# Altium PCB SV601187A.PcbDoc (part 1 of 2)
Units mil, origin at the board's own origin, x right, y up, seen from the top; angles counter-clockwise.
Board outline 3260 x 1865 mil, 4 copper layers (Top Layer, MidLayer1, MidLayer2, Bottom Layer), stack 61.2 mil thick; 103 components, 64 nets, 340 pads, 114 vias.
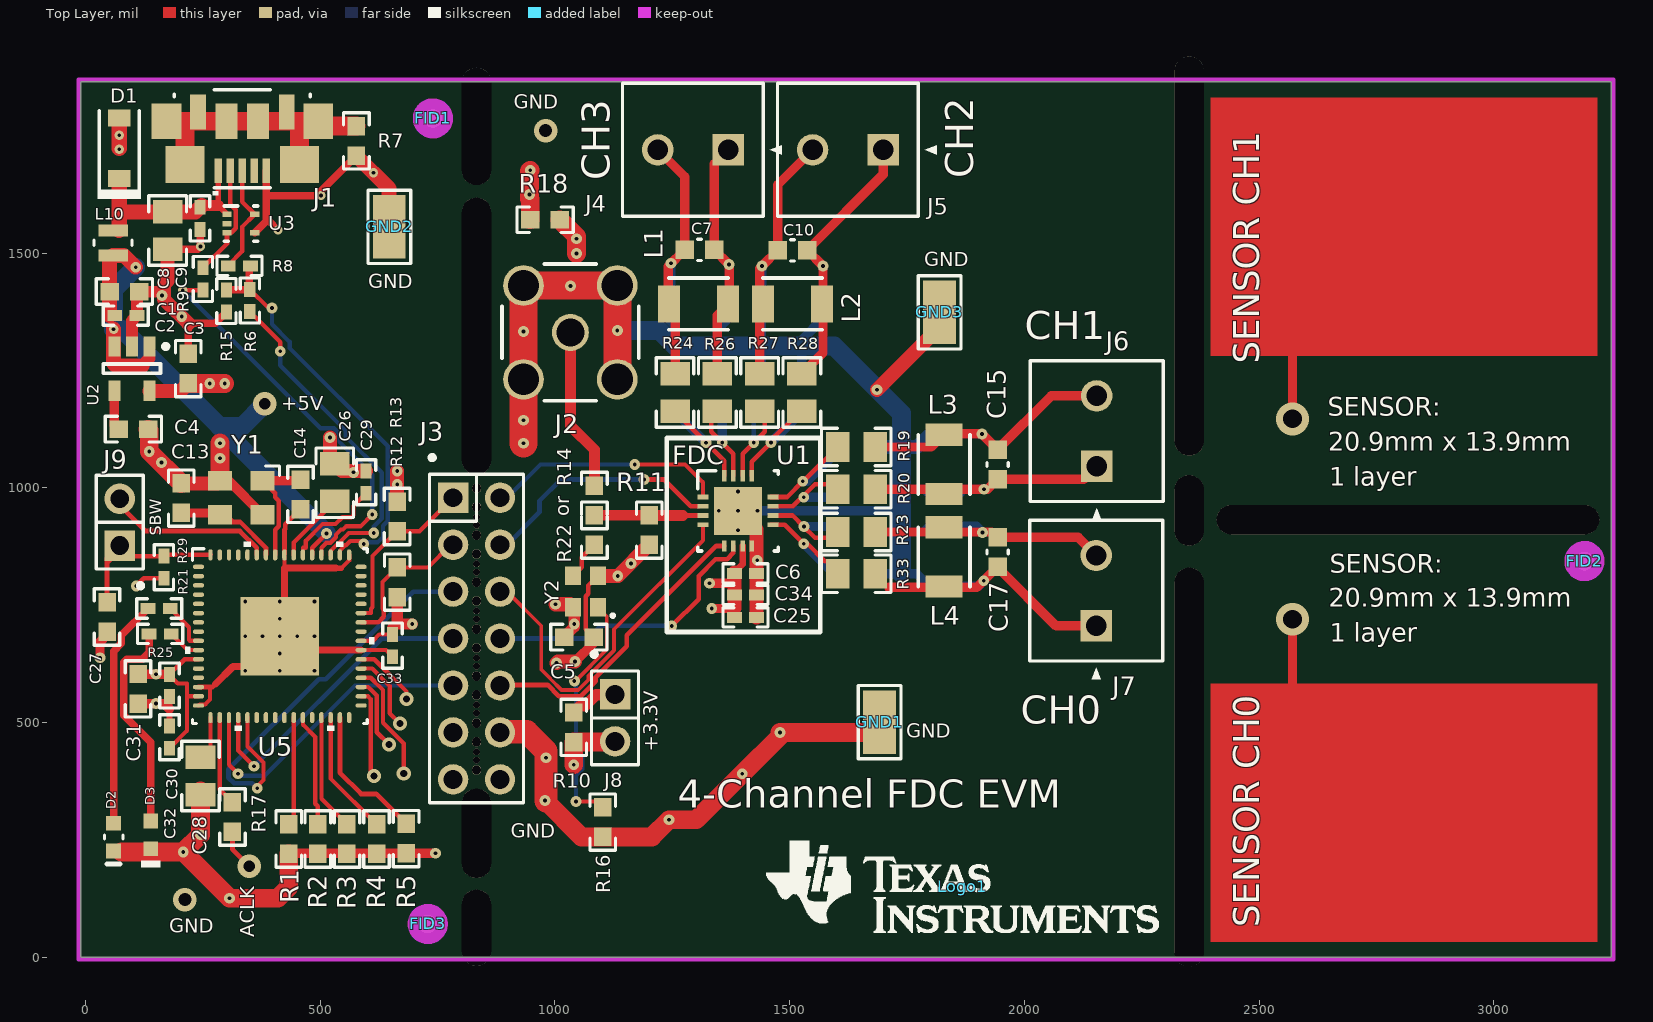
[diagram p0: Top Layer view]
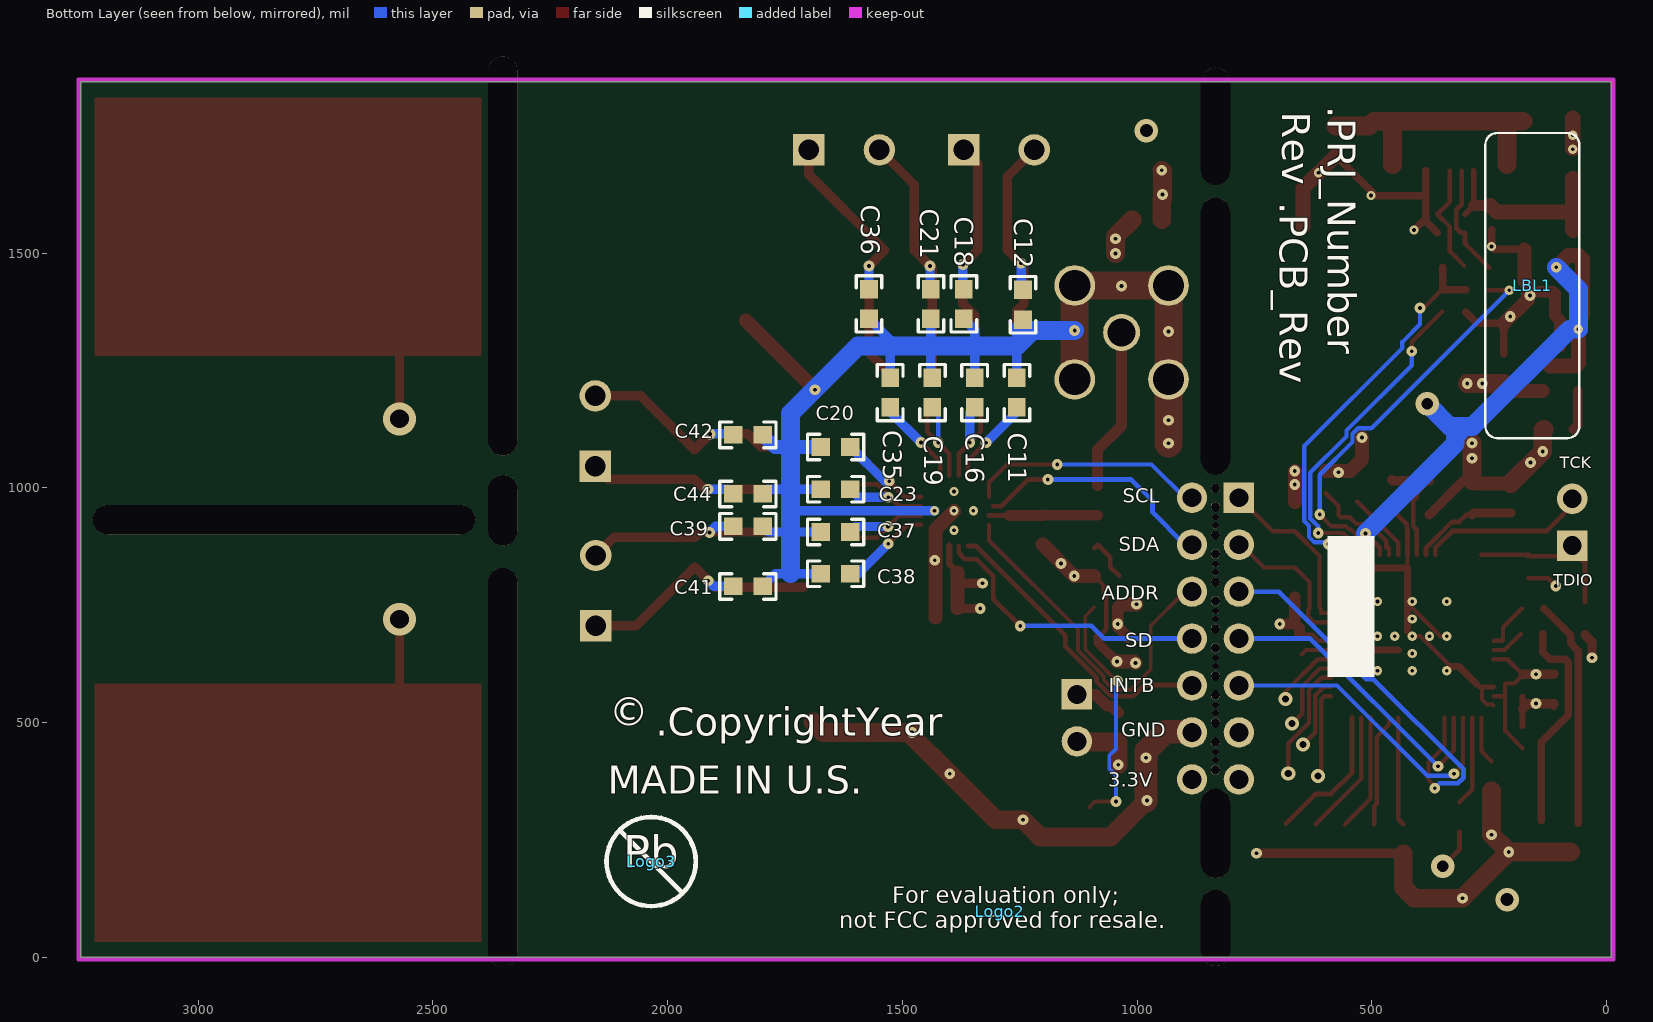
[diagram p1: Bottom Layer view, seen from below]
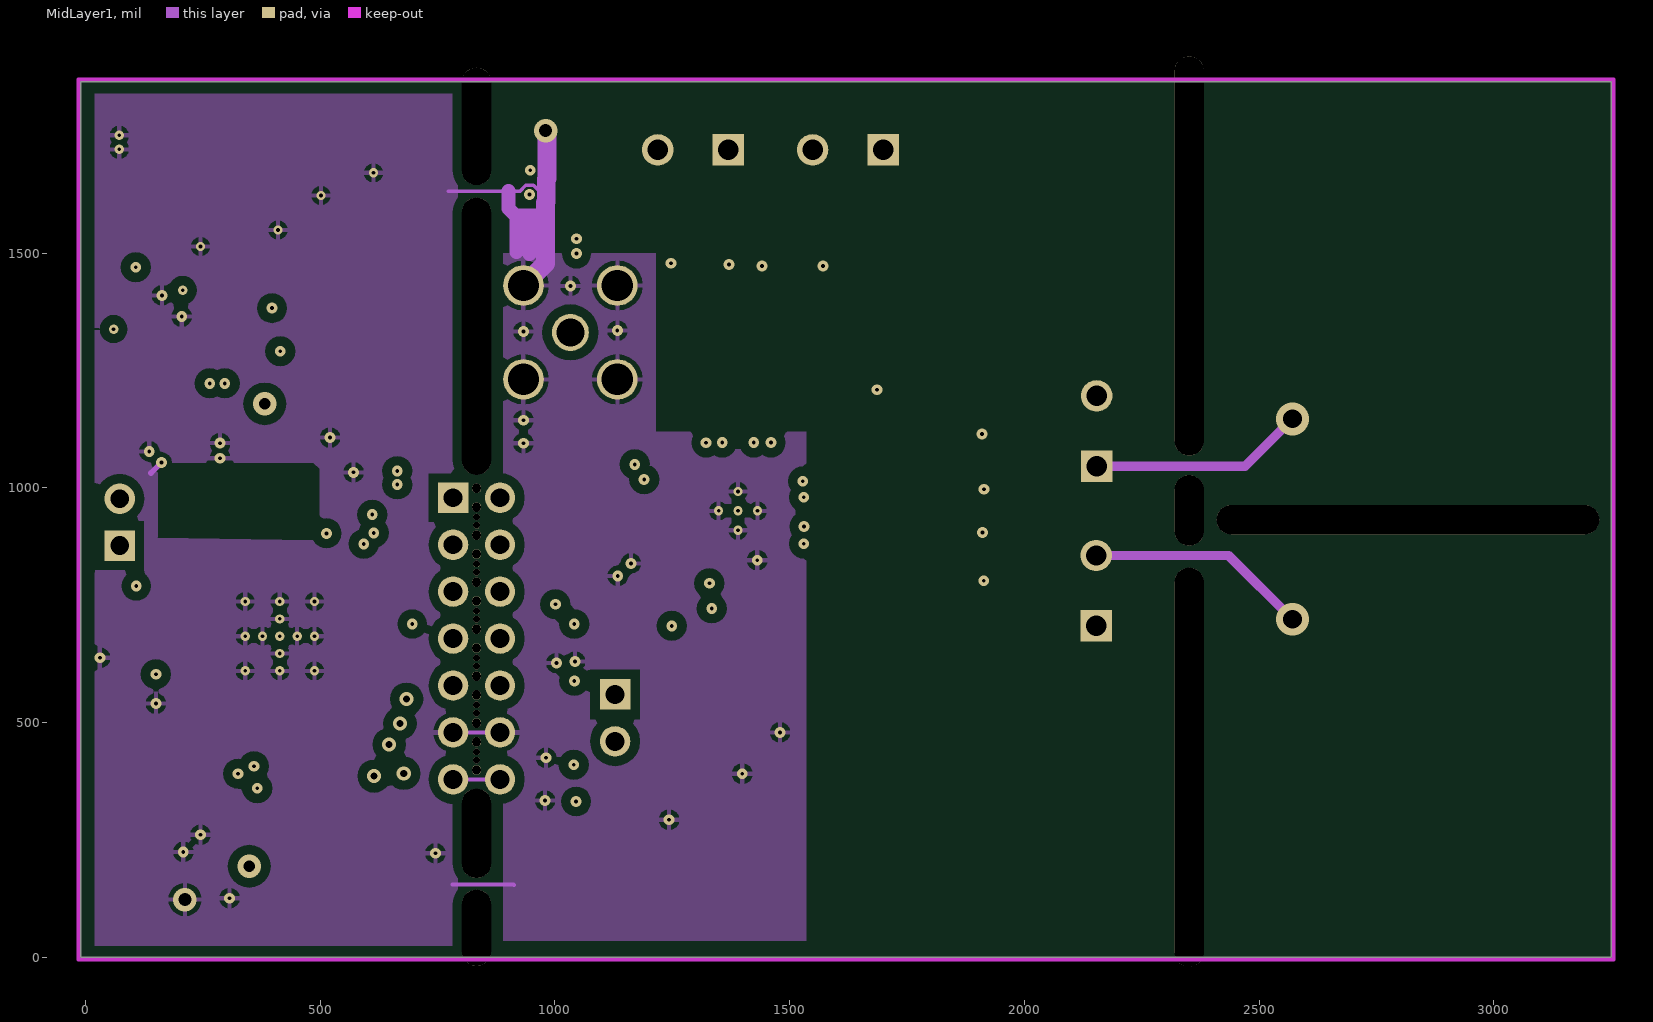
[diagram p2: MidLayer1]
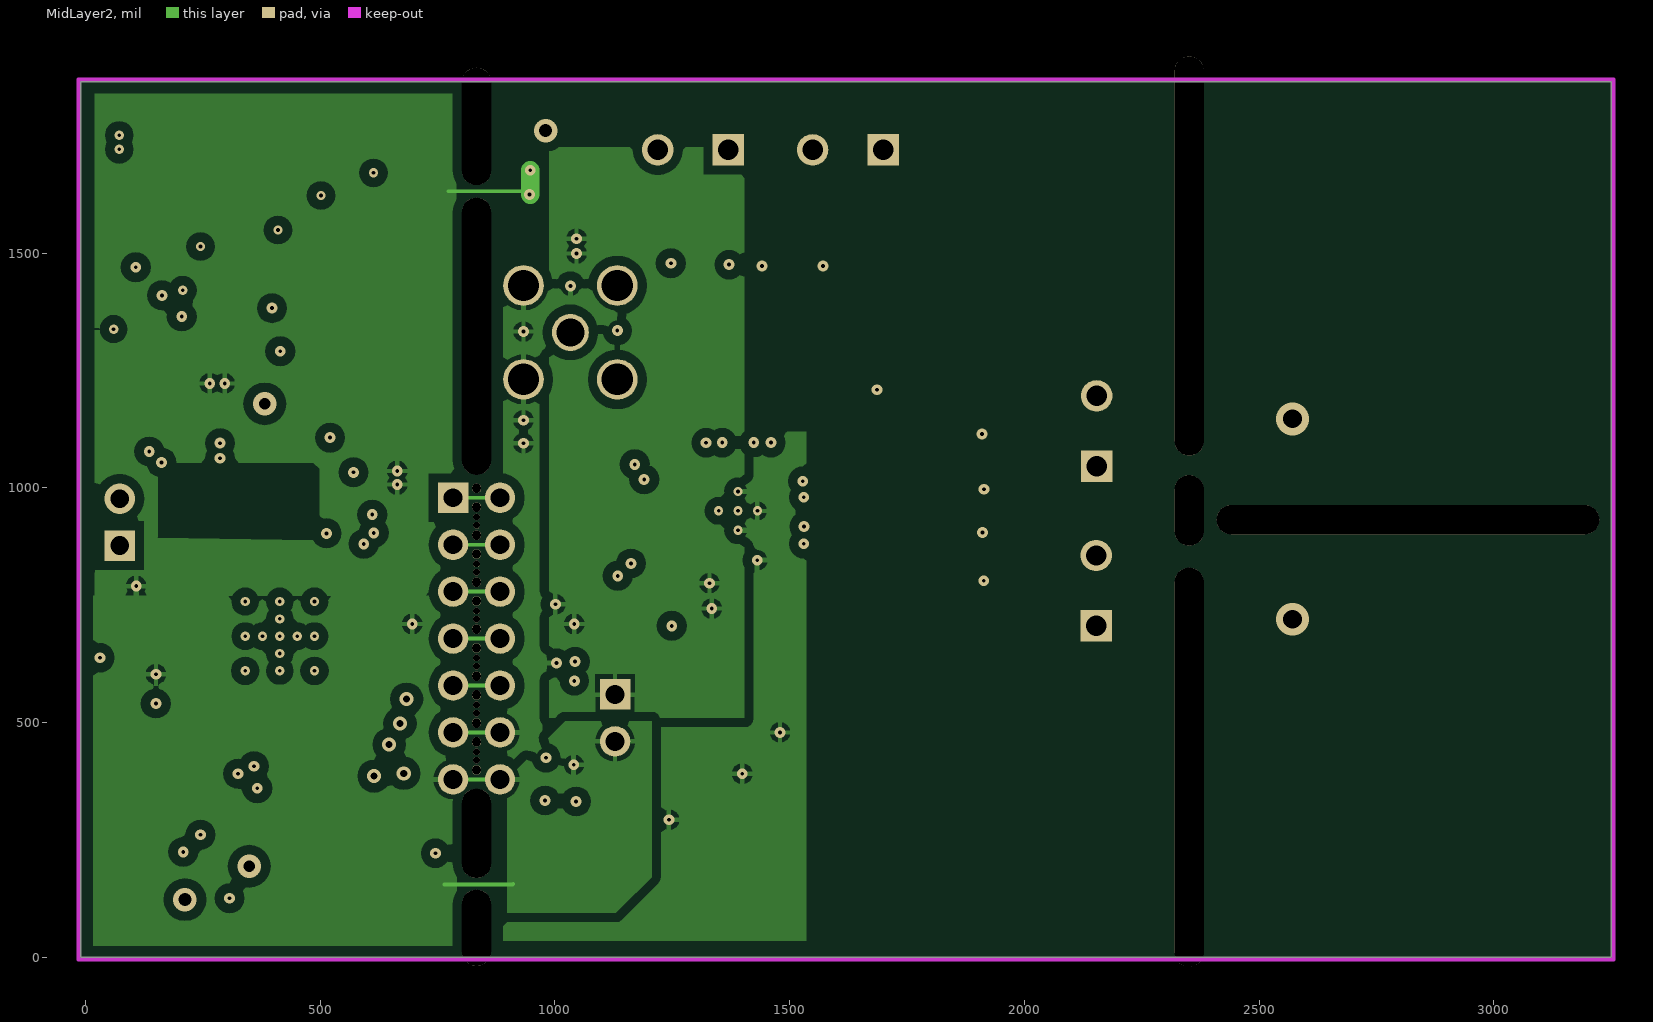
[diagram p3: MidLayer2]

## Layer stack, top to bottom
Top Solder: solder mask 0.4, Solder Resist, Dk 3.5
Top Layer: signal copper 1.4
Dielectric1: core 12.6, FR-4, Dk 3.9
MidLayer1: signal copper 1.4
Dielectric2: prepreg 30.4, FR-4, Dk 3.9
MidLayer2: signal copper 1.4
Dielectric3: core 12.6, FR-4, Dk 4.8
Bottom Layer: signal copper 1.4
Bottom Solder: solder mask 0.4, Solder Resist, Dk 3.5

## Board outline
-10,0 3250,0 3250,1865 -10,1865

## Design rules (kind name [scope] priority, off if disabled: settings)
AcuteAngle [All] p1: minimum=4.50000000000000E+0001 checktracksonly=FALSE
AssemblyTestPointUsage [All] p1: valid=2
Clearance Clearance_BoardEdge_MountingHoles [OnCopper and InComponentClass('Mounting Holes') vs IsKeepOut] p1: gap=40 ignorepadtopadclearanceinfootprint=FALSE except(0: Arc-Hole Track-Hole SMDPad-Hole THPad-Hole Via-Hole Fill-Hole Poly-Hole Region-Hole Text-Hole)
Clearance Clearance_BoardEdge_Poly [OnCopper and InPoly vs IsKeepOut] p2: gap=25 ignorepadtopadclearanceinfootprint=FALSE except(0: Arc-Hole Track-Hole SMDPad-Hole THPad-Hole Via-Hole Fill-Hole Poly-Hole Region-Hole Text-Hole)
Clearance Clearance_BoardEdge [OnCopper and Not InComponentClass('Logo') and not InComponentClass('FiducialMark') and not InRegion(1000,500,4000,800) and Not IsKeepout vs IsKeepOut] p3: gap=30 ignorepadtopadclearanceinfootprint=FALSE except(0: Arc-Hole Track-Hole SMDPad-Hole THPad-Hole Via-Hole Fill-Hole Poly-Hole Region-Hole Text-Hole)
Clearance Clearance_Poly [InPolygon] p4: gap=20 ignorepadtopadclearanceinfootprint=FALSE except(0: Arc-Hole Track-Hole SMDPad-Hole THPad-Hole Via-Hole Fill-Hole Poly-Hole Region-Hole Text-Hole)
Clearance [All] p5: gap=4 ignorepadtopadclearanceinfootprint=FALSE except(0: Arc-Hole Track-Hole SMDPad-Hole THPad-Hole Via-Hole Fill-Hole Poly-Hole Region-Hole Text-Hole)
ComponentClearance ComponentClearance_Logo [InComponentClass('Logo')] p1: gap=50 collisioncheckmode=3 verticalgap=10 showdistances=FALSE
ComponentClearance ComponentClearance_ScrewToNut [(HasFootprint('NY PMS 440 0025 PH')) vs (HasFootprint('Keystone_1902C'))] p2: gap=5 collisioncheckmode=3 verticalgap=10 showdistances=FALSE
ComponentClearance ComponentClearance_MountingHoles [InComponentClass('Mounting Holes')] p3: gap=250 collisioncheckmode=3 verticalgap=100000 showdistances=FALSE
ComponentClearance ComponentClearance_SmallPassives [HasFootprint('0201*') or HasFootprint('0402*') or HasFootprint('0508') or HasFootprint('0603*') or HasFootprint('0612') or HasFootprint('0805*') or HasFootprint('0815*') or HasFootprint('0830*') or HasFootprint('1206*') or HasFootprint('1210*') or HasFootprint('1808*') or HasFootprint('1812*') or HasFootprint('1825*') or HasFootprint('2010*') or HasFootprint('2220*') or HasFootprint('2225*') or HasFootprint('2512*') or HasFootprint('2728*') or HasFootprint('3518*') vs HasFootprint('0201*') or HasFootprint('0402*') or HasFootprint('0508') or HasFootprint('0603*') or HasFootprint('0612') or HasFootprint('0805*') or HasFootprint('0815*') or HasFootprint('0830*') or HasFootprint('1206*') or HasFootprint('1210*') or HasFootprint('1808*') or HasFootprint('1812*') or HasFootprint('1825*') or HasFootprint('2010*') or HasFootprint('2220*') or HasFootprint('2225*') or HasFootprint('2512*') or HasFootprint('2728*') or HasFootprint('3518*')] p4: gap=20 collisioncheckmode=3 verticalgap=10 showdistances=FALSE
ComponentClearance ComponentClearance_THtoSMT [IsThruComponent vs IsSMTComponent] p5: gap=75 collisioncheckmode=3 verticalgap=30 showdistances=FALSE
ComponentClearance ComponentClearance_THtoTH [IsThruComponent vs IsThruComponent] p6: gap=78.74 collisioncheckmode=3 verticalgap=30 showdistances=TRUE
ComponentClearance [All] p7: gap=40 collisioncheckmode=3 verticalgap=10 showdistances=FALSE
DiffPairsRouting [All] p1: maxlimit=100 minlimit=10 mostfreqgap=10 toplayer_minwidth=15 toplayer_maxwidth=15 toplayer_prefwidth=15 midlayer1_minwidth=15 midlayer1_maxwidth=15 midlayer1_prefwidth=15 midlayer2_minwidth=15 midlayer2_maxwidth=15 midlayer2_prefwidth=15 bottomlayer_minwidth=15 bottomlayer_maxwidth=15 bottomlayer_prefwidth=15 maxuncoupledlength=1000
FabricationTestPointUsage TestPointUsage [All] p1: valid=2 allowmultiple=FALSE
FabricationTestpoint Testpoint [All] p1: side=3 testpointundercomponent=TRUE minsize=40 maxsize=100 preferedsize=60 minholesize=0 maxholesize=40 preferedholesize=32 testpointgrid=1 allowsidetop=TRUE allowsidebottom=TRUE usegrid=TRUE gridtolerance=0.01
FanoutControl Fanout_LCC [IsLCC] p1: bgadir=Out bgaviamode=Centered fanoutstyle=Auto fanoutdirection=Alternating viagrid=1 // Fanout_LCC (Default Rule)
FanoutControl Fanout_BGA [IsBGA] p2: bgadir=Out bgaviamode=Centered fanoutstyle=Auto fanoutdirection=Alternating viagrid=1 // Fanout_BGA (Default Rule)
FanoutControl Fanout_Default [All] p4: bgadir=Out bgaviamode=Centered fanoutstyle=Auto fanoutdirection=Alternating viagrid=1 // Fanout_Default (Default Rule)
FanoutControl Fanout_Small [(CompPinCount < 5)] p5: bgadir=Out bgaviamode=Centered fanoutstyle=Auto fanoutdirection=OutThenIn viagrid=1 // Fanout_Small (Default Rule)
HoleSize [All] p1: absolutevalues=TRUE maxlimit=251 minlimit=7.87 maxpercent=80.000 minpercent=20.000
HoleToHoleClearance [All] p1: gap=21 allowstackedmicrovias=TRUE
MinimumAnnularRing MinimumAnnularRing_ThermalPadVias [IsVia and InAnyComponent] p1: minimumring=5.91
MinimumAnnularRing [All] p2: minimumring=6
MinimumSolderMaskSliver MinimumSolderMaskSliver_Logo [InComponentClass('Logo') vs InComponentClass('Logo')] p1: minsoldermaskwidth=0.7
MinimumSolderMaskSliver [All] p2: minsoldermaskwidth=3.94
PlaneConnect [All] p1: planeconnectstyle=Relief reliefexpansion=10 reliefentries=4 reliefconductorwidth=10 reliefairgap=10
PolygonConnect [All] p1: connectstyle=Relief reliefconductorwidth=10 reliefentries=4 polygonreliefangle="90 Angle" airgapwidth=10
RoutingVias ThermalPadVias [IsVia and InAnyComponent] p1: holewidth=7.87 width=19.68 viastyle="Through Hole" minholewidth=7.87 minwidth=19.68 maxholewidth=12.99 maxwidth=23.62
RoutingVias [All] p2: holewidth=16 width=34 viastyle="Through Hole" minholewidth=7.87 minwidth=20 maxholewidth=40 maxwidth=65
SMDToCorner [All] p1: distance=30000
SilkToSilkClearance [All] p1: silktosilkclearance=5
SilkToSolderMaskClearance SilkscreenOverComponentPads [IsPad] p1: minsilkscreentomaskgap=5 clearancetoexposedcopper=TRUE
SolderMaskExpansion [All] p1: expansion=1.97 istentingtop=FALSE
Width [All] p1: maxlimit=100 minlimit=4 preferedwidth=10 checkconnectedcopper=TRUE
15 further rules are at their usual default settings.

## Classes and differential pairs
component class Label: LBL1
component class FiducialMark: FID1 FID2 FID3
component class Logo: Logo1
component class Header: J3 J8 J9

## Components (designator, comment, footprint, x,y, rotation, side; value= is the part's Value field where it differs from the comment)
C1 "C1608X5R1A106M" 0603 83,1418 r0 top
C2 "GRM155R71C104JA88D" 0402 85.99,1366.82 r0 top
C3 "C0603C225K8PACTU" 0603 219,1254 r90 top
C4 "C1608C0G1E103J" 0603 102,1125 r0 top
C5 "C1608C0G1E103J" 0603 1051,682 r0 top
C6 "C1005X7R1C103K" 0402 1406,818 r0 top
C7 "CL10C330FB8NNNC" 0603_950 1308,1507 r0 top
C8 "C2012X5R1C226K125AC" 0805_HV 175,1548 r270 top
C9 "GRM155R71C104JA88D" 0402 244,1574 r270 top
C10 "CL10C330FB8NNNC" 0603_950 1506,1506 r0 top
C11 "GRM1885C2A180JA01D" 0603 1256,1203 r270 bottom
C12 "GRM1885C2A180JA01D" 0603 1243,1390.04 r90 bottom
C13 "GRM1885C2A180JA01D" 0603 204,978 r270 top
C14 "GRM1885C2A180JA01D" 0603 458,986 r90 top
C15 "CL10C330FB8NNNC" 0603_950 1943,1050 r270 top
C16 "GRM1885C2A180JA01D" 0603 1346,1203 r90 bottom
C17 "CL10C330FB8NNNC" 0603_950 1943,863 r270 top
C18 "GRM1885C2A180JA01D" 0603 1368.99,1392 r270 bottom
C19 "GRM1885C2A180JA01D" 0603 1436,1203 r270 bottom
C20 "GRM1885C2A180JA01D" 0603 1642,1087 r180 bottom
C21 "GRM1885C2A180JA01D" 0603 1439.07,1392 r90 bottom
C23 "GRM1885C2A180JA01D" 0603 1642,997 r0 bottom
C25 "GRM155R61A105KE15D" 0402 1406,724 r0 top
C26 "08053C224JAT2A" 0805_HV 531,1011 r90 top
C27 "C0603X222K5RACTU" 0603 46,725 r90 top
C28 "08053C224JAT2A" 0805_HV 245,386 r270 top
C29 "C1005C0G1H221F050BA" 0402 598,1012 r90 top
C30 "GRM155R71C104JA88D" 0402 179,579 r270 top
C31 "C1608X5R1A106M" 0603 112,572 r270 top
C32 "GRM155R71C104JA88D" 0402 179,469 r90 top
C33 "GRM155R71C104JA88D" 0402 654,664 r270 top
C34 "GRM155R71C104JA88D" 0402 1406,772 r0 top
C35 "GRM1885C2A180JA01D" 0603 1526,1203 r90 bottom
C36 "GRM1885C2A180JA01D" 0603 1570.96,1392 r270 bottom
C37 "GRM1885C2A180JA01D" 0603 1642,906 r180 bottom
C38 "GRM1885C2A180JA01D" 0603 1642,817 r0 bottom
C39 "GRM1885C2A180JA01D" 0603 1829,917.96 r0 bottom
C41 "GRM1885C2A180JA01D" 0603 1829,790.01 r180 bottom
C42 "GRM1885C2A180JA01D" 0603 1829,1112.99 r0 bottom
C44 "GRM1885C2A180JA01D" 0603 1829,987.01 r180 bottom
D1 "MMSZ5232B-7-F" SOD-123 72,1723 r90 top
D2 "LG L29K-G2J1-24-Z" "LG L29K_GREEN" 60,256 r270 top
D3 "SML-LX0603SRW-TR" SML-LX0603SRW_SuperRed 139,261 r270 top
FID1 "Fiducial" Fiducial10-20 740,1787 r0 top
FID2 "Fiducial" Fiducial10-20 3193,844 r0 top
FID3 "Fiducial" Fiducial10-20 729,71 r0 top
GND1 "5015" Testpoint_Keystone_Miniature 1691,501 r90 top
GND2 "5015" Testpoint_Keystone_Miniature 647,1556 r90 top
GND3 "5015" Testpoint_Keystone_Miniature 1819,1374 r90 top
J1 "ZX62R-B-5P" Hirose_ZX62R-B-5P 334,1781 r90 top
J2 "901-144-8RFX" Amphenol_901-144-8RFX 1033,1331 r90 top
J3 "TSW-107-07-G-D" TSW-107-07-G-D 833,679 r270 top
J4 "1727010" PhoenixConact_1727010 1294,1720 r180 top
J5 "1727010" PhoenixConact_1727010 1624,1720 r180 top
J6 "1727010" PhoenixConact_1727010 2154,1121 r90 top
J7 "1727010" PhoenixConact_1727010 2153,781 r90 top
J8 "TSW-102-07-G-S" TSW-102-07-G-S 1128,510 r270 top
J9 "TSW-102-07-G-S" TSW-102-07-G-S 73,927 r90 top
L1 "CMH322522-180KL" CMH322522 1306,1392 r180 top
L2 "CMH322522-180KL" CMH322522 1506,1392 r180 top
L3 "CMH322522-180KL" CMH322522 1829,1050 r90 top
L4 "CMH322522-180KL" CMH322522 1829,853 r90 top
L10 "VLS201610ET-100M" VLS201610ET 59,1522 r270 top
LBL1 "Size: 0.65\" x 0.20 \"" Label_650x200 158,1430.93 r90 bottom
Logo1 "Texas Instruments" TI_Stacked_Overlay_Small 1868,150 r0 top
Logo2 "FCC disclaimer" FCC_disclaimer_stacked 1292,97 r180 bottom
Logo3 "Pb-Free Symbol" Pb-Free_Overlay_Medium 2035,204 r180 bottom
R1 "CRCW06030000Z0EA" 0603 433,252 r270 top
R2 "CRCW06030000Z0EA" 0603 495,252 r270 top
R3 "CRCW06030000Z0EA" 0603 557,252 r270 top
R4 "CRCW06030000Z0EA" 0603 620,252 r270 top
R5 "CRCW06030000Z0EA" 0603 683,253 r270 top
R6 "CRCW04021K50JNED" 0402 350,1399 r270 top
R7 "CRCW060333R0JNEA" 0603 577,1739 r90 top
R8 "CRCW040210R0FKED" 0402 328,1473 r0 top
R9 "CRCW040210R0FKED" 0402 250,1445 r270 top
R10 "CRCW06030000Z0EA" 0603 1040,490 r90 top
R11 "CRCW060349R9FKEA" 0603 1201,910 r90 top
R12 "RC0603FR-074K7L" 0603 664,799 r270 top
R13 "RC0603FR-074K7L" 0603 664,939 r90 top
R14 "CRCW06030000Z0EA" 0603 1084,973 r270 top
R15 "RC0402JR-071ML" 0402 300,1398 r90 top
R16 "CRCW06030000Z0EA" 0603 1102,288 r90 top
R17 "CRCW060333R0JNEA" 0603 313,299 r270 top
R18 "CRCW06030000Z0EA" 0603 979,1571 r0 top
R19 "CRCW08050000Z0EA" 0805_HV 1642,1087 r0 top
R20 "CRCW08050000Z0EA" 0805_HV 1642,997 r0 top
R21 "CRCW04021K00JNED" 0402 157,743 r180 top
R22 "CRCW06030000Z0EA" 0603 1084,910 r90 top
R23 "CRCW08050000Z0EA" 0805_HV 1642,906 r0 top
R24 "CRCW08050000Z0EA" 0805_HV 1256,1203 r90 top
R25 "CRCW04021K00JNED" 0402 159,689 r180 top
R26 "CRCW08050000Z0EA" 0805_HV 1346,1203 r90 top
R27 "CRCW08050000Z0EA" 0805_HV 1436,1203 r90 top
R28 "CRCW08050000Z0EA" 0805_HV 1526,1203 r90 top
R29 "CRCW040233K0JNED" 0402 167,831 r90 top
R33 "CRCW08050000Z0EA" 0805_HV 1642,817 r0 top
U1 "FDC2114RGHR" RGH0016A 1390,951 r0 top
U2 "LP2985AIM5-3.3/NOPB" MF05A_N 99,1254 r270 top
U3 "TPD2E001DRLR" DRL0005A 331,1563 r0 top
U5 "MSP430F5528IRGC" RGC0064B 414,684 r0 top
Y1 "ABM8-24.000MHZ-B2-T" XTAL_ABM8 332,979 r270 top
Y2 "625L3C040M00000" OSC_CTS_625 1065,779 r180 top

## Footprints (in the part's own frame and the unit in brackets; to place one, negate y for a bottom-side part, rotate by r counter-clockwise, add the part's x,y. Pads: shape width x height; smd on the part's side, far side on the other; paste and mask are expansions set on the pad)
0402 [mm] "0402 from SM-752 data"
  rect 0.8x0.6 smd: 1(-0.6,0) 2(0.6,0)
  silkscreen extent -1.22,-0.52 1.22,0.52, body extent -0.55,-0.3 0.55,0.3, height 0.6
0603 [mm] "0603 from SM-752 data"
  rect 1x0.95 smd: 1(-0.8,0) 2(0.8,0)
  silkscreen extent -1.52,-0.69 1.52,0.69, body extent -0.87,-0.47 0.87,0.47, height 0.85
0603_950 [mm] "0603_950"
  rect 1x1 smd: 1(-0.8,0) 2(0.8,0)
  silkscreen extent -0.1,-0.58 0.1,0.58, body extent -0.87,-0.48 0.87,0.48, height 0.95
0805_HV [mil] "0805 with 30mil clearance between pads"
  rect 50x63 smd: 1(-40,0) 2(40,0)
  silkscreen extent -74,-40 74,40, body extent -43,-29 43,29, height 43
Amphenol_901-144-8RFX [mm] "SMA Straight Jack, TH"
  round 2 hole 1.5: 1(0,0)
  round 2.2 hole 1.7: 2(-2.54,2.54) 3(-2.54,-2.54) 4(2.54,-2.54) 5(2.54,2.54)
  silkscreen extent -3.7,-3.7 3.7,3.7, body extent -3.7,-3.7 3.7,3.7, height 9.93
CMH322522 [mm] "Bourns"
  rect 1.2x2 smd: 1(-1.6,0) 2(1.6,0)
  silkscreen extent -1.6,-1.4 1.6,1.4, body extent -1.7,-1.35 1.7,1.35, height 2.4
DRL0005A [mm] "SOTFL, 5-Flat Leads, Body 1.2x1.6x0.6mm, Pitch 0.5mm, TI recommended"
  rect 0.5x0.3 smd: 1(-0.75,0.5) 2(-0.75,0) 3(-0.75,-0.5) 4(0.75,-0.5) 5(0.75,0.5)
  silkscreen extent -0.9,-0.95 0.9,0.95, body extent -0.85,-0.85 0.85,0.85, height 0.62
FCC_disclaimer_stacked [mil]
Fiducial10-20 [mm]
  round 1 smd mask+0.5: 1(0,0)
  Top Layer keep-out circle w1.178: c0,0 r0.5
Hirose_ZX62R-B-5P [mm] "Hirose"
  rect 1.35x0.4 smd: 1(-2.68,1.3) 2(-2.68,0.65) 3(-2.68,0) 4(-2.68,-0.65) 5(-2.68,-1.3)
  rect 2x2.1 smd: 6(-2.35,-3.1) 7(-2.35,3.1)
  rect 1.9x1.6 smd: 8(0,-4.1) 13(0,4.1)
  rect 1.88x0.85 smd: 9(0.495,-2.4) 12(0.495,2.4)
  rect 1.9x1.2 smd: 10(0,-0.85) 11(0,0.85)
  silkscreen extent -4,-3.67 1.7,3.67, body extent -2.57,-3.48 2.11,3.45, height 2.65
Label_650x200 [mil] "Thermal Transfer Label"
  round 1 on Mech14: 0(0,0)
  silkscreen extent -325,-100 325,100, body extent -325,-100 325,100, height 1
"LG L29K_GREEN" [mm] "OSRAM"
  rect 0.8x0.8 smd paste-0.4: 1(-0.75,0) 2(0.75,0)
  silkscreen extent -0.1,-0.5 1.45,0.5, body extent -0.9,-0.45 0.9,0.45, height 0.67
MF05A_N [mm] "SOT23, 5-Leads, Body 2.9x1.6mm, Pitch 0.95mm, Lead Span 2.8mm, IPC Medium Density"
  rect 1.1x0.65 smd: 1(-1.2,0.95) 2(-1.2,0) 3(-1.2,-0.95) 4(1.2,-0.95) 5(1.2,0.95)
  silkscreen extent -1.32,-1.55 0.25,1.95, body extent -0.9,-1.55 0.9,1.55, height 1.19
OSC_CTS_625 [mm] "CTS"
  rect 0.85x1 smd: 1(-0.675,0.85) 2(-0.675,-0.85) 3(0.675,-0.85) 4(0.675,0.85)
  silkscreen extent -1.53,1.25 -1.43,1.35, body extent -1.1,-1.35 1.1,1.35, height 1.02
Pb-Free_Overlay_Medium [mil]
  silkscreen extent -95,-95 95,95
PhoenixConact_1727010 [mm]
  rect 1.7x1.7 hole 1.1: 1(-1.905,0)
  round 1.7 hole 1.1: 2(1.905,0)
  silkscreen extent -4.8,-3.6 3.81,3.6, body extent -3.81,-3.6 3.81,3.7, height 8.52
RGC0064B [mm]
  oval 0.6x0.24 smd mask+0.07: 1(-4.4,3.75) 2(-4.4,3.25) 3(-4.4,2.75) 4(-4.4,2.25) 5(-4.4,1.75) 6(-4.4,1.25) 7(-4.4,0.75) 8(-4.4,0.25) 9(-4.4,-0.25) 10(-4.4,-0.75) 11(-4.4,-1.25) 12(-4.4,-1.75) 13(-4.4,-2.25) 14(-4.4,-2.75) 15(-4.4,-3.25) 16(-4.4,-3.75) 33(4.4,-3.75) 34(4.4,-3.25) 35(4.4,-2.75) 36(4.4,-2.25) 37(4.4,-1.75) 38(4.4,-1.25) 39(4.4,-0.75) 40(4.4,-0.25) 41(4.4,0.25) 42(4.4,0.75) 43(4.4,1.25) 44(4.4,1.75) 45(4.4,2.25) 46(4.4,2.75) 47(4.4,3.25) 48(4.4,3.75)
  oval 0.24x0.6 smd mask+0.07: 17(-3.751,-4.4) 18(-3.251,-4.4) 19(-2.751,-4.4) 20(-2.251,-4.4) 21(-1.75,-4.4) 22(-1.25,-4.4) 23(-0.75,-4.4) 24(-0.25,-4.4) 25(0.25,-4.4) 26(0.75,-4.4) 27(1.25,-4.4) 28(1.75,-4.4) 29(2.251,-4.4) 30(2.751,-4.4) 31(3.251,-4.4) 32(3.751,-4.4) 49(3.751,4.4) 50(3.251,4.4) 51(2.751,4.4) 52(2.251,4.4) 53(1.75,4.4) 54(1.25,4.4) 55(0.75,4.4) 56(0.25,4.4) 57(-0.25,4.4) 58(-0.75,4.4) 59(-1.25,4.4) 60(-1.75,4.4) 61(-2.251,4.4) 62(-2.751,4.4) 63(-3.251,4.4) 64(-3.751,4.4)
  rect 4.25x4.25 smd paste-2.112: 65(0,0)
  silkscreen extent -5.1,-5.1 5.1,5.1, body extent -4.57,-4.57 4.57,4.57, height 1.01
RGH0016A [mm] "QFN, 16-Leads, Body 4x4mm, Pitch 0.5mm, TI Recommended"
  rect 0.6x0.25 smd: 1(-1.9,0.75) 2(-1.9,0.25) 3(-1.9,-0.25) 4(-1.9,-0.75) 9(1.9,-0.75) 10(1.9,-0.25) 11(1.9,0.25) 12(1.9,0.75)
  rect 0.25x0.6 smd: 5(-0.75,-1.9) 6(-0.25,-1.9) 7(0.25,-1.9) 8(0.75,-1.9) 13(0.75,1.9) 14(0.25,1.9) 15(-0.25,1.9) 16(-0.75,1.9)
  rect 2.6x2.6 smd paste-1.3: 17(0,0)
  silkscreen extent -2.17,-2.17 2.17,2.17, body extent -2.05,-2.05 2.05,2.05, height 0.81
SML-LX0603SRW_SuperRed [mm] "Lumex Opto/Components Inc"
  rect 0.8x0.8 smd: 1(-0.75,0) 2(0.75,0)
  silkscreen extent 1.4,-0.52 1.78,0.53, body extent -0.92,-0.53 0.92,0.53, height 1.1
SOD-123 [mm] "On Semi recommended land pattern"
  rect 0.915x1.22 smd: 1(-1.637,0) 2(1.637,0)
  silkscreen extent -2.74,-1.17 2.03,1.17, body extent -1.93,-0.9 1.93,0.9, height 1.35
Testpoint_Keystone_Miniature [mil] "Miniature SMT test point"
  rect 135x70 smd: 1(0,0)
  silkscreen extent -78,-46 78,45, body extent -52,-20 52,20, height 61
TI_Stacked_Overlay_Small [mil]
  silkscreen extent -418,-98 418,98
TSW-102-07-G-S [mm] "Samtec 100mil, 1x2, 230 mil above insulator"
  rect 1.65x1.65 hole 1.016 mask+0: 1(-1.27,0)
  round 1.65 hole 1.016 mask+0: 2(1.27,0)
  silkscreen extent -3.56,-1.27 2.54,1.27, body extent -2.54,-1.27 2.54,1.27, height 8.38
TSW-107-07-G-D [mm] "Samtec 100mil, 2x7, 230 mil above insulator"
  rect 1.65x1.65 hole 1.016 mask+0: 1(-7.62,-1.27)
  round 1.65 hole 1.016 mask+0: 2(-7.62,1.27) 3(-5.08,-1.27) 4(-5.08,1.27) 5(-2.54,-1.27) 6(-2.54,1.27) 7(0,-1.27) 8(0,1.27) 9(2.54,-1.27) 10(2.54,1.27) 11(5.08,-1.27) 12(5.08,1.27) 13(7.62,-1.27) 14(7.62,1.27)
  silkscreen extent -9.91,-2.54 8.89,2.54, body extent -8.89,-2.54 8.89,2.54, height 8.38
VLS201610ET [mm] "TDK"
  rect 0.65x1.6 smd: 1(-0.675,0) 2(0.675,0)
  silkscreen extent -0.15,-1.02 0.15,1.02, body extent -1.05,-0.85 1.05,0.85, height 0.95
XTAL_ABM8 [mm] "Abracon recommended land pattern"
  rect 1.05x1.3 smd: 1(-0.925,1.15) 2(-0.925,-1.15) 3(0.925,-1.15) 4(0.925,1.15)
  silkscreen extent -1.73,1.3 -1.2,2.07, body extent -1.35,-1.7 1.35,1.7, height 0.8

## Part data
C1 C31: "CAP, CERM, 10uF, 10V, +/-20%, X5R, 0603"
C2 C9 C30 C32 C33 C34: library part 0402YC132KAT2A, "CAP CER 0.1UF 16V 5% X7R 0402"
C3: "CAP, CERM, 2.2uF, 10V, +/-10%, X5R, 0603"
C4 C5: "CAP, CERM, 0.01uF, 25V, +/-5%, C0G/NP0, 0603"
C6: "CAP, CERM, 0.01 礔, 16 V, +/- 10%, X7R, 0402"
C7 C10 C15 C17: "CAP, CERM, 33 pF, 50 V, +/- 1%, C0G/NP0, 0603_950"
C8: "CAP, CERM, 22uF, 16V, +/-10%, X5R, 0805"
C11 C12 C13 C14 C16 C18 C19 C20 C21 C23 C35 C36 C37 C38 C39 C41 C42 C44: "CAP, CERM, 18pF, 100V, +/-5%, C0G/NP0, 0603"
C25: "CAP, CERM, 1uF, 10V, +/-10%, X5R, 0402"
C26 C28: "CAP, CERM, 0.22 礔, 25 V, +/- 5%, X7R, 0805"
C27: "CAP, CERM, 2200pF, 50V, +/-10%, X7R, 0603"
C29: library part 0402YC132KAT2A, "CAP CER 220PF 50V 1% NP0 0402"
D1: "Diode, Zener, 5.6V, 500mW, SOD-123"
D2: "LED, Green, SMD"
D3: "LED, Super Red, SMD"
FID1 FID2 FID3: "Fiducial mark.  There is nothing to buy or mount."
GND1 GND2 GND3: "Test Point, Miniature, SMT"
J1: "Connector, Receptacle, Micro-USB Type B, SMT"
J2: "SMA Straight Jack, Gold, 50 Ohm, TH"
J3: "Header, 100mil, 7x2, Gold, TH"
J4 J5 J6 J7: "Conn Term Block, 2POS, 3.81mm, TH"
J8 J9: "Header, TH, 100mil, 2x1, Gold plated, 230 mil above insulator"
L1 L2 L3 L4: "Inductor, Shielded, Ferrite, 18 礖, 0.12 A, 3.3 ohm, SMD"
L10: "Inductor, Shielded, Ferrite, 10 礖, 0.4 A, 1.38 ohm, SMD"
LBL1: library part THT-14-423-10, "Thermal Transfer Printable Labels, 0.650\" W x 0.200\" H - 10,000 per roll"
Logo1: library part TI_Logo, "Texas Instrument Corporate Signature"
Logo2: library part FCC_disclaimer, "FCC_disclaimer"
Logo3: library part Pb-Free
R1 R2 R3 R4 R5 R10 R14 R16 R18 R22: "RES, 0 ohm, 5%, 0.1W, 0603"
R6: library part CRCW040233K0JNED, "RES 1.5K OHM 1/16W 5% 0402 SMD"
R7 R17: "RES, 33 ohm, 5%, 0.1W, 0603"
R8 R9: "RES, 10.0, 1%, 0.063 W, 0402"
R11: "RES, 49.9, 1%, 0.1 W, 0603"
R12 R13: "RES, 4.70k ohm, 1%, 0.1W, 0603"
R15: library part CRCW040233K0JNED, "RES,1M ohm, 5%, 0.063W, 0402"
R19 R20 R23 R24 R26 R27 R28 R33: "RES, 0 ohm, 5%, 0.125W, 0805"
R21 R25: "RES, 1.0k ohm, 5%, 0.063W, 0402"
R29: "RES, 33k ohm, 5%, 0.063W, 0402"
U1: "Multi-Channel 12/26-Bit Capacitance to Digital Converter (FDC) for Capacitive Sensing, RGH0016A"
U2: "Micropower 150 mA Low-Noise Ultra Low-Dropout Regulator, 5-pin SOT-23, Pb-Free"
U3: "Low-Capacitance + / - 15 kV ESD-Protection Array for High-Speed Data Interfaces, 2 Channels, -40 to +85 degC, 5-pin SOT (DRL), Green (RoHS & no Sb/Br)"
U5: "Mixed Signal MicroController, RGC0064B"
Y1: "Crystal, 24.000MHz, 18pF, SMD"
Y2: "OSC, 40 MHz, 3.3 V, SMD"

## Free pads (board coordinates)
  oval 62x162 hole 62 slot 162 at 90 deg unplated: 0(833,63)
  oval 62x190 hole 62 slot 190 at 90 deg unplated: 0(833,264)
  round 20 hole 20 unplated: 0(833,399) 0(833,459) 0(833,499) 0(833,559) 0(833,599) 0(833,659) 0(833,699) 0(833,759) 0(833,799) 0(833,859) 0(833,899) 0(833,959) 0(833,999)
  round 14 hole 14 unplated: 0(833,420) 0(833,438) 0(833,520) 0(833,538) 0(833,620) 0(833,638) 0(833,720) 0(833,738) 0(833,820) 0(833,838) 0(833,920) 0(833,938)
  oval 62x590 hole 62 slot 590 at 90 deg unplated: 0(833,1323)
  oval 62x250 hole 62 slot 250 at 90 deg unplated: 0(833,1770)
  oval 62x850 hole 62 slot 850 at 90 deg unplated: 0(2351,405) 0(2351,1494)
  oval 62x150 hole 62 slot 150 at 90 deg unplated: 0(2351,952)
  oval 815x62 hole 62 slot 815 at 0 deg unplated: 0(2817,932)

## Via types
v1: diameter 23, hole 8, Top Layer to Bottom Layer, tented both sides, 77 vias
v2: diameter 19.68, hole 7.87, Top Layer to Bottom Layer, 18 vias
v3: diameter 20, hole 8, Top Layer to Bottom Layer, tented both sides, 8 vias
v4: diameter 30, hole 15, Top Layer to Bottom Layer, 5 vias
v5: diameter 50, hole 28, Top Layer to Bottom Layer, 2 vias
v6: diameter 50, hole 25, Top Layer to Bottom Layer, 2 vias
v7: diameter 70, hole 40, Top Layer to Bottom Layer, 2 vias

## Nets (pads, with @x,y where several pads share a name; then routed paths per layer and width w, separated by ;. In a path a pad name is that pad's centre, name@x,y a point inside that pad or via, vN(x,y) a via of type N, cw(c..) or ccw(c..) an arc to the next point about the centre after c; other vN are vias at no path point)
+3.3V: C3.1 C30.1 C31.1 C32.1 C33.1 J3.13 J3.14 J8.2 R10.1 R12.2 R13.2 R18.1 R29.1 U2.5 U5.11 U5.15 U5.40 | length 1846.7
  Top Layer w9: C32.1@179,445.38 216.46,482.84 216.46,583.54 196.46,583.54 ; 218.51,556.05 U5.15@240.77,556.05 ; U5.40@587.23,674.16 612.16,674.16 625.62,687.62 C33.1@654,687.62 ; 196.46,583.54 178.19,601.81 196.46,583.54 ; C33.1@649,692.62 649,682 649,687.62 C33.1@649,692.62 ; C33.1@649,692.62 654,697.62 C33.1@649,692.62
  Top Layer w10: v1(108,791) 124.38,807.38 R29.1@167,807.38 ; C30.1@179,602.62 211.17,634.79 U5.11@240.77,634.79 ; C33.1@654,701.57 657.59,705.16
  Top Layer w20: C31.1@112,603.5 C31.1@112.87,602.62 ; C31.1@112.87,602.62 177.38,602.62 C31.1@112.87,602.62
  Top Layer w24: C33.1@654,687.62 654,697.62 C33.1@654,701.57 ; R12.2@664,767.5 664,710 v1(696,710)
  Top Layer w30: U2.5@136.4,1206.76 203.25,1206.76 C3.1@219,1222.5 ; R13.2@664,970.5 v1(664,1036)
  Top Layer w40: C3.1@219,1222.5 v1(296.5,1222.5) ; v1@946,1615 v1(946,1625) 946,1674.99 v1(947.5,1676.5) ; R18.1@947.5,1571 v1@947.5,1615 ; v1(1040,410) R10.1@1040,458.5 1126.5,458.5 J8.2@1128,460
  MidLayer1 w8: J3.13@793,379 J3.14@893,379
  MidLayer2 w8: 764,155 910,155 911,156 ; J3.13@773,379 J3.14@883,379 ; 773,1632 939,1632 v1(946,1625)
  MidLayer2 w40: v1@947.5,1625 v1(947.5,1676.5) v1@947.5,1625
  other v1: 150,603 664,1007 264.73,1222.5
+5V: C1.1 C2.1 L10.2 U2.1 U2.3 U5.53 | length 1415
  Top Layer w10: U5.53@482.91,857.23 482.92,872.43 v1(513.49,903)
  Top Layer w26: 120.08,1259.59 136.4,1275.91 136.4,1276.59
  Top Layer w32: L10.2@51.5,1487.93 C1.1@51.5,1418 ; L10.2@59,1495.43 81.57,1495.43 v1(107,1470) ; 120.08,1259.59 66.2,1259.59 60,1265.8 ; C1.1@51.5,1418 51.5,1366.82 C1.1@51.5,1418 ; 60,1265.8 v3(60,1338) 60,1265.8
  Bottom Layer w40: v1(107,1470) 60,1423 v3(60,1338) 78.49,1338 285.71,1130.78 301.43,1130.78 ; v6(382,1179) 333.78,1130.78 301.43,1130.78 ; v1(513.49,903) 322.22,1094.26 322.22,1109.98 301.43,1130.78
ADDR: J3.5 J3.6 U1.4 U5.21 | length 1782.2
  Top Layer w8: J3.6@898,779 970.81,706.19 970.81,613 990,593.81 990,593.18 1013.86,569.32 1049.48,569.32 1071.08,590.92 1071.08,599.08 1073.52,601.52 1073.52,601.59 1086.41,614.48 1086.48,614.48 1125.89,653.89 1125.89,698.88 1315.2,888.19 U1.4@1315.2,921.47
  Top Layer w9: U5.21@345.09,510.77 345.09,449.2 379,415.28 379,377.99 ; 379,377.99 361.01,360 379,377.99
  Top Layer w10: v1@361.01,360 v1(366,360)
  MidLayer2 w8: J3.5@783,779 J3.6@883,779
  Bottom Layer w10: v1(366,360) 355.5,370.5 316.51,370.5 304.5,382.51 304.5,400.21 496.79,592.5 512,592.5 698.5,779 J3.5@783,779
CLKIN: R11.2 R14.2 R22.2 U1.3 | length 235.5
  Top Layer w10: 1272.16,941.16 U1.3@1315.2,941.16
  Top Layer w23: R22.2@1084,941.5 R11.2@1200,941.5 ; 1272.16,941.16 R11.2@1202.34,941.16 ; R11.2@1200,941.5 R11.2@1201,942.5 ; R11.2@1200,941.5 R11.2@1201,942.5 ; R11.2@1201,942.5 R11.2@1202.34,941.16 ; R11.2@1201,942.5 R11.2@1202.34,941.16
GND: C1.2 C2.2 C3.2 C4.2 C5.2 C6.2 C8.2 C9.2 C11.1 C12.1 C13.1 C14.1 C16.2 C18.2 C19.1 C20.1 C21.1 C23.2 C25.2 C26.2 C27.1 C28.2 C29.2 C30.2 C31.2 C32.2 C33.2 C34.2 C35.2 C36.2 C37.1 C38.2 C39.1 C41.2 C42.1 C44.2 D1.2 D2.2 D3.2 GND1.1 GND2.1 GND3.1 J1.5 J2.2 J2.3 J2.4 J2.5 J3.11 J3.12 R1.2 R2.2 R3.2 R4.2 R5.2 R7.1 R11.1 R15.1 R16.1 U1.8 U1.17 U2.2 U3.4 U5.14 U5.16 U5.39 U5.49 U5.56 U5.65 Y1.2 Y1.4 Y2.2 | length 10583.5
  Top Layer w9: U5.16@240.77,536.36 243.23,538.82 254.99,538.82 265.08,548.91 265.08,570.23 ; U5.65@331,619 396,684 v2(414,684) ; v2(340.18,684) 354,684 U5.65@420.91,750.91 ; 423.85,829 U5.56@423.85,857.23 ; 545.2,829 561.68,845.47 U5.49@561.67,857.23 ; U5.39@587.23,654.47 639.91,654.47 C33.2@649,645.38
  Top Layer w10: U5.14@240.77,575.73 270.59,575.73 276.93,582.07 ; U5.56@423.85,857.23 423.85,910.37 425.87,912.39 425.87,922.37 C14.1@458,954.5 ; C5.2@1082.5,682 1065.84,698.65 1065.84,768.95 1071.11,774.22 1071.11,792 Y2.2@1091.57,812.46
  Top Layer w12: C32.2@178.89,492.62 C32.2@179,492.62 179,529 C30.2@179,555.38 ; 533.45,829 545.2,829
  Top Layer w15: 276.93,582.07 313.86,619 U5.65@331,619 ; U5.65@423.85,693.85 423.85,829 533.45,829 ; U5.65@443.53,654.47 U5.39@587.23,654.47
  Top Layer w16: C31.2@112,535.18 C31.2@112,540.5 ; 175,1394 175,1394.12 ; C8.2@175,1508 239,1508 v3(245,1514) C9.2@245,1549.38 ; 218,1351 276.62,1351 R15.1@300,1374.38 ; C3.2@219,1285.5 219,1350 ; U3.4@360.53,1543.32 385.18,1567.97 ; J1.5@385.18,1675.49 385.18,1622 ; v3(410.01,1549.25) 391.29,1567.97 385.18,1567.97 ; R7.1@577,1707.5 491.5,1622 385.18,1622 ; 385.18,1567.97 385.18,1622
  Top Layer w20: v1(31,638) 31,671.4 30.7,671.7 C27.1@46,687 ; C31.2@112,540.5 167.5,540.5 179,529 ; Y1.2@286.72,1015.42 304.44,1015.42 Y1.4@377.28,942.58 ; R1.2@433,220.5 434,221.5 R5.2@683,221.5 v1(745.5,221.5) ; v1(1043,630) 1082.5,669.5 C5.2@1082.5,682
  Top Layer w25: U2.2@99,1301.24 99,1356.21 C2.2@109.61,1366.82 109.61,1413.11 C1.2@114.5,1418 151.12,1418
  Top Layer w30: v1@167.38,1410 167.38,1401.74 175,1394.12 ; v1@167.38,1418 167.38,1433.39 175,1441.01 C8.2@175,1508 ; 175,1394 218,1351 219,1350 ; C13.1@204,1009.5 280.8,1009.5 Y1.2@286.72,1015.42 ; v1(521,1107) 521,1061 C26.2@531,1051 546.38,1035.62 C29.2@598,1035.62 ; v1(1003.31,626.78) 1006.53,630 v1(1043,630) ; Y2.2@1091.57,812.46 v1(1133.96,812.46) R11.1@1201,879.5 ; v2(1390,951) U1.17@1429.62,911.38 ; C25.2@1429.62,724 C34.2@1429.62,772 U1.17@1429.62,911.38 ; C6.2@1429.62,818 U1.17@1429.62,911.38 ; v1(1686,1209) GND3.1@1833,1356
  Top Layer w32: v3@72,1723.01 D1.2@72,1787.47 ; R7.1@577,1707.5 647,1637.5 GND2.1@647,1556
  Top Layer w40: 77,224.47 v1(208.47,224.47) ; C4.2@133.5,1125 135.99,1122.5 v1(135.99,1077.5) C13.1@204,1009.5 ; C28.2@245,354.5 v1(245,261) v1(208.47,224.47) ; Y1.2@286.72,1015.42 v1(286.72,1095.28) ; R1.2@433,220.5 433,149 410,126 v1(306.94,126) v1(208.47,224.47) ; v1(979,334) 1056.5,256.5 R16.1@1102,256.5 1206.5,256.5 v1(1243,293) 1301,293 v1(1399,391) 1479.5,471.5 v1(1479.5,479) 1669,479 GND1.1@1691,501
  Top Layer w50: J3.12@883,479 884,480 940,480 981,439 v1(981,425) v1@981,334
  Top Layer w60: v1(933,1095) J2.2@933,1231 J2.5@933,1431 J2.4@1133,1431 J2.3@1133,1231
  MidLayer1 w8: 773,1632 901,1632 925.42,1632 937.92,1644.5 954.08,1644.5 962.58,1636 981.5,1636 ; 782,155 912,155 913,154 ; J3.11@793,479 J3.12@883,479 J3.12@893,479
  MidLayer1 w12: 139.53,1031.53 v1(162,1054)
  MidLayer1 w30: 901,1632 901,1595 918,1578 ; 918,1503 918,1578 ; 946,1498 947,1499 947,1580 ; 980,1580 947,1580 ; 918,1578 920,1580 947,1580
  MidLayer1 w40: J2.5@933,1431 980,1478 980,1580 980,1607.3 981.5,1608.8 981.5,1636 981.5,1657.28 983,1658.79 983,1758 v5(980,1761)
  MidLayer2 w8: J3.11@773,479 J3.11@783,479 J3.12@883,479
  Bottom Layer w20: C12.1@1243,1358.54 1256,1345.54 1256,1304 1256,1302 C11.1@1256,1234.5 ; C16.2@1346,1234.5 1346,1302 ; 1346,1304 1346,1337.51 C18.2@1368.99,1360.5 ; v2(1431.34,951) 1735,951 1738,954 ; C19.1@1436,1234.5 1439.07,1237.57 1439.07,1302 ; 1439.07,1304 C21.1@1439.07,1360.5 ; C35.2@1526,1234.5 1526,1302 ; 1526,1304 1526,1315.54 C36.2@1570.96,1360.5 ; C38.2@1673.5,817 1738,817 1770.51,817 C41.2@1797.5,790.01 ; C37.1@1673.5,906 1738,906 1785.54,906 C39.1@1797.5,917.96 ; C23.2@1673.5,997 1738,997 1787.51,997 C44.2@1797.5,987.01
  Bottom Layer w30: 1256,1304 1346,1304 1439.07,1304 1526,1304 ; C20.1@1673.5,1087 1738,1087 1771.51,1087 C42.1@1797.5,1112.99
  Bottom Layer w40: v1(1133,1335) 1223,1335 1256,1302 1346,1302 1439.07,1302 1526,1302 1595,1302 1738,1159 1738,1087 1738,997 1738,954 1738,906 1738,817
  other v1: 150,540.5 1162,839 1431,846 571,1033 286.72,1063 933,1144 933,1333 205,1365 163,1410 1033,1430
  other v2: 340.18,610.18 414,610.18 487.82,610.18 414,647.09 377.09,684 450.91,684 487.82,684 414,720.91 340.18,757.82 414,757.82 487.82,757.82 1390,909.66 1348.66,951 1390,992.34
  other v3: 501.61,1622.67 613.5,1671 72,1721 72,1751
  other v5: 212,123
IN0A: C38.1 R33.1 U1.9 | length 262.1
  Top Layer w10: U1.9@1459.8,921.47 1489.53,921.47 v1(1530,881) 1538,881 1574.88,844.12 ; R33.1@1594,817 R33.1@1602,817
  Bottom Layer w20: v1(1530,881) 1594,817 C38.1@1610.5,817
IN0B: C37.2 R23.1 U1.10 | length 230.6
  Top Layer w10: U1.10@1459.8,941.16 1506.84,941.16 v1(1530.42,917.58) 1554,894 R23.1@1586,894
  Bottom Layer w20: v1(1530.42,917.58) 1598.92,917.58 C37.2@1610.5,906
IN1A: C23.1 R20.1 U1.11 | length 298
  Top Layer w10: U1.11@1459.8,960.84 1506.84,960.84 ; R20.1@1584,1008 1554,1008 ; 1506.84,960.84 1554,1008 ; 1506.84,960.84 1554,1008
  Bottom Layer w20: v1(1530,980) 1593.5,980 C23.1@1610.5,997
IN1B: C20.2 R19.1 U1.12 | length 299
  Top Layer w10: U1.12@1459.8,980.53 1479.61,980.53 1494.53,980.53 v1(1528,1014) 1529,1014 R19.1@1602,1087
  Bottom Layer w20: v1(1528,1014) 1537.5,1014 C20.2@1610.5,1087
IN2A: C35.1 R28.1 U1.13 | length 284.4
  Top Layer w10: U1.13@1419.53,1025.8 1419.53,1055.76 v1(1460.19,1096.42) 1460.19,1102.13 1520.94,1159.84 1525.92,1159.72 R28.1@1526,1159.71
  Bottom Layer w20: v1(1460.19,1096.42) 1526,1162.23 C35.1@1526,1171.5
IN2B: C19.2 R27.1 U1.14 | length 223
  Top Layer w10: U1.14@1399.84,1025.8 1399.84,1072.84 v1(1423.42,1096.42) 1447,1120 R27.1@1447,1152
  Bottom Layer w10: v1(1423.42,1096.42) 1423.42,1162.93 C19.2@1431,1170.5